# Altium PCB E-29 Humidity Sensor.PcbDoc
Units mil, origin at the board's own origin, x right, y up, seen from the top; angles counter-clockwise.
Board outline 1078 x 1543 mil, 2 copper layers (Top Layer, Bottom Layer); 16 components, 16 nets, 70 pads, 11 vias.
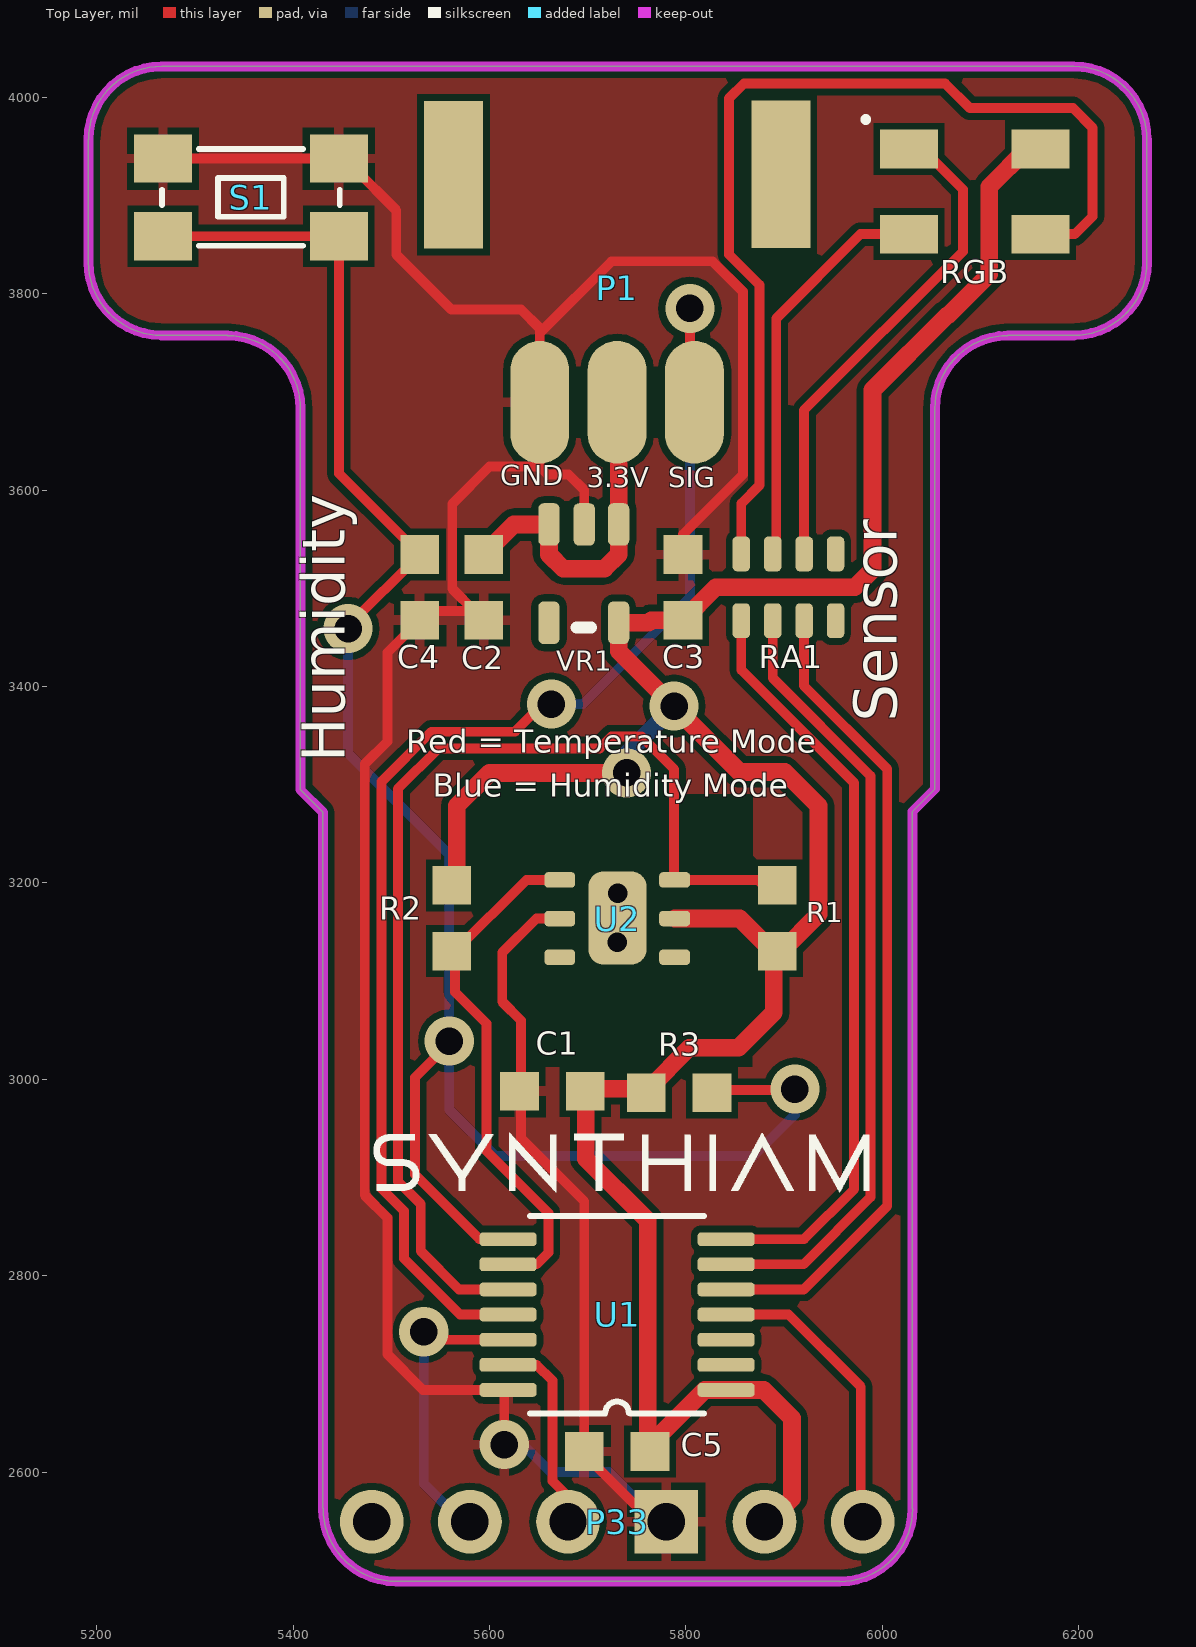
[diagram p0: Top Layer view]
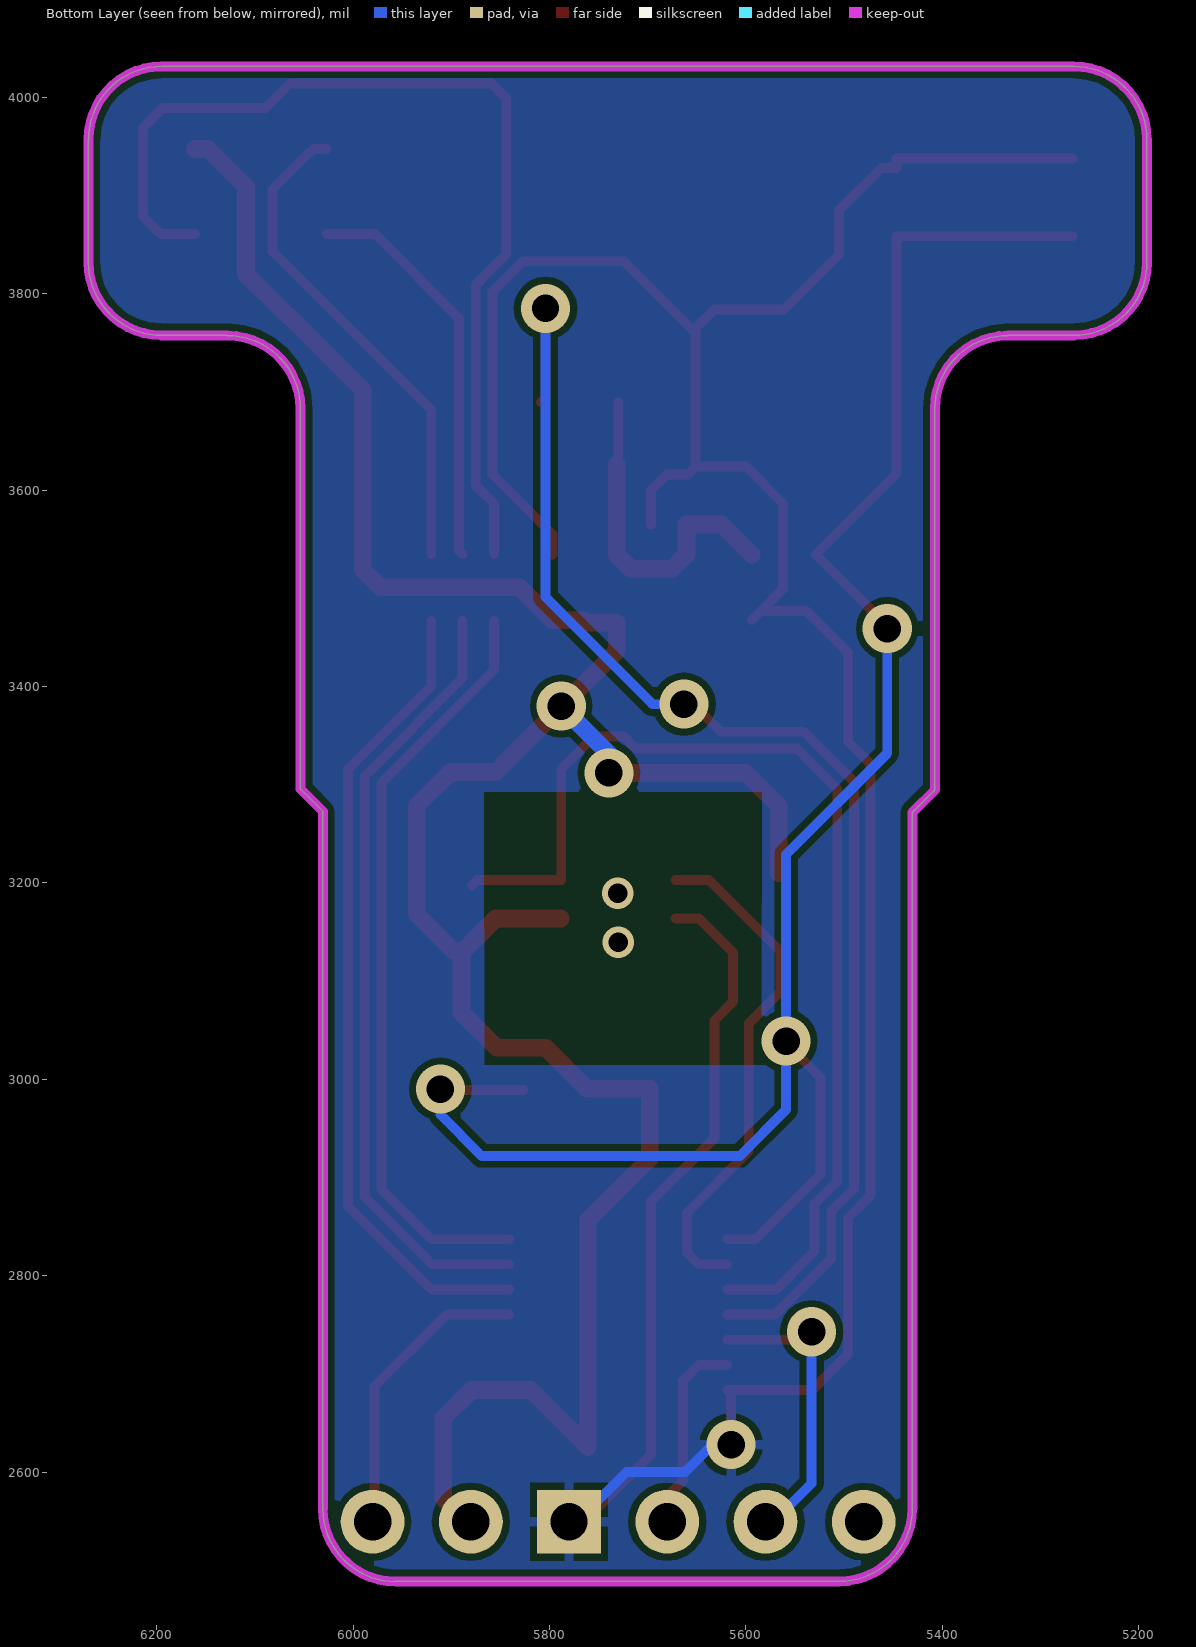
[diagram p1: Bottom Layer view, seen from below]

## Layer stack, top to bottom
Top Layer: signal copper 1.4
Dielectric: dielectric 12.6, FR-4, Dk 4.8
Bottom Layer: signal copper 1.4

## Board outline
5407.5,3294.81 5407.5,3683 ccw(c5333.19,3683) 5333.19,3757.31 5333.19,3757.5 5265.81,3757.5 5265.81,3757.69 cw(c5265.81,3832) 5191.5,3832 5191.5,3957.19 5191.69,3957.19 cw(c5266,3957.19) 5266,4031.5 6195,4031.5 cw(c6195,3957.19) 6269.31,3957.19 6269.5,3957.19 6269.5,3832 cw(c6195.19,3832) 6195.19,3757.69 6195.19,3757.5 6127.81,3757.5 6127.81,3757.31 ccw(c6127.81,3683) 6053.5,3683 6053.5,3295.5 6030.69,3272.69 6030.69,2562.81 6030.81,2562.81 cw(c5956.5,2562.81) 5956.5,2488.5 5956.5,2488.69 5504.81,2488.69 cw(c5504.81,2563) 5430.5,2563 5430.31,2563 5430.31,3272

## Design rules (kind name [scope] priority, off if disabled: settings)
Clearance [All] p1: gap=7
PolygonConnect [All] p1: connectstyle=Relief reliefconductorwidth=10 reliefentries=4 polygonreliefangle="90 Angle"
RoutingVias [All] p1: holewidth=28 width=50 viastyle="Through Hole" minholewidth=28 minwidth=50 maxholewidth=28 maxwidth=50
SilkscreenOverComponentPads [All] p1: minsilkscreentomaskgap=10
SolderMaskExpansion [All] p1: expansion=4
Width Width_1 [InNet('VCC')] p1: maxlimit=25 minlimit=10 preferedwidth=18 minimp=50.000000 maximp=50.000000 favimp=50.000000
Width Width_2 [InNet('VIN')] p2: maxlimit=25 minlimit=10 preferedwidth=18 minimp=50.000000 maximp=50.000000 favimp=50.000000
Width [All] p3: maxlimit=25 minlimit=7 preferedwidth=10 minimp=50.000000 maximp=50.000000 favimp=50.000000
27 further rules are at their usual default settings.

## Components (designator, comment, footprint, x,y, rotation, side; value= is the part's Value field where it differs from the comment)
C1 "100nF" "0603 TIGHT" 5664,2988 r180 top
C2 "2.2uF" "0603 TIGHT" 5594,3501 r270 top
C3 "100nF" "0603 TIGHT" 5797,3501 r90 top
C4 "100nF" "0603 TIGHT" 5529,3501 r270 top
C5 "100nF" "0603 TIGHT" 5730,2621 r180 top
P1 "JST 3-pin" "JST-PH 3-pin SMD" 5730,3805.5 r0 top
P33 "Header 6" HDR1X6 5980,2549.5 r180 top
R1 "10kohm" "0603 TIGHT" 5893,3164 r270 top
R2 "10kohm" "0603 TIGHT" 5561.5,3164 r90 top
R3 "10kohm" "0603 TIGHT" 5793,2986.5 r180 top
RA1 "680 ohm" "Resistor Array 4" 5905,3499.82 r0 top (schematic designator RA4)
RGB "RGBLED-CA" RGBLED-CA 6094,3904 r180 top (schematic designator LED1)
S1 "BTN" SW-SMD 5357,3898.06 r0 top
U1 "PIC16F1704" TSSOP14 5729,2762 r180 top
U2 "HDC1080" HDC1080 5730,3163.71 r0 top
VR1 "3.3VREG" "SOT-25 New" 5696.5,3508 r0 top

## Footprints (in the part's own frame and the unit in brackets; to place one, negate y for a bottom-side part, rotate by r counter-clockwise, add the part's x,y. Pads: shape width x height; smd on the part's side, far side on the other; paste and mask are expansions set on the pad)
"0603 TIGHT" [mm]
  rect 1x1 smd: 1(-0.85,0) 2(0.85,0)
HDC1080 [mm]
  rrect50% 1.5x2.4 smd: 0(0.005,0.015)
  rrect50% 0.8x0.4 smd: 1(-1.485,1) 2(-1.485,0) 3(-1.485,-1) 4(1.485,-1) 5(1.485,0) 6(1.485,1)
HDR1X6 [mil] "Connector; Header; 6 Position"
  round 65 hole 38: 1(0,0) 2(100,0) 4(300,0) 5(400,0) 6(500,0)
  rect 65x65 hole 38: 3(200,0)
"JST-PH 3-pin SMD" [mil]
  rect 60x150 smd: 0(-166.71,115.62) 0(166.71,116.02)
  oval 60x125 smd: 1(-78.82,-116.02) 2(-0.08,-116.02) 3(78.66,-116.02)
"Resistor Array 4" [mm]
  rrect50% 0.45x0.9 smd: 1(-1.235,-0.834) 2(-1.235,0.894) 3(-0.422,-0.834) 4(-0.422,0.894) 5(0.391,-0.834) 6(0.391,0.894) 7(1.204,-0.834) 8(1.204,0.894)
RGBLED-CA [mm]
  rect 1.5x1 smd: 1(1.7,-1.1) 2(-1.7,-1.1) 3(-1.7,1.1) 4(1.7,1.1)
  silkscreen extent 2.81,-1.88 2.83,-1.85
"SOT-25 New" [mm]
  rrect50% 0.55x1.1 smd: 1(-0.914,-1.092) 2(0.889,-1.092) 3(0,1.448) 4(-0.914,1.448) 5(0.889,1.448)
  silkscreen extent -0.2,-1.22 0.18,-1.22
SW-SMD [mm]
  rect 1.5x1.25 smd: 1(-2.275,-1.005) 1(2.275,-1.005) 2(-2.275,1.005) 2(2.275,1.005)
  silkscreen extent -2.3,-1.25 2.3,1.25
TSSOP14 [mil] "PIC16F1503"
  rrect50% 58x14 smd mask+4: 1(-111.87,78.35) 2(-111.87,52.76) 3(-111.87,27.17) 4(-111.87,1.57) 5(-111.87,-24.02) 6(-111.87,-49.61) 7(-111.87,-75.2) 8(110.13,-75.2) 9(110.13,-49.61) 10(110.13,-24.02) 11(110.13,1.57) 12(110.13,27.17) 13(110.13,52.76) 14(110.13,78.35)
  silkscreen extent -89,-99 88,102

## Part data
C1 C2 C3 C4 C5: library part Cap, "Capacitor"
P1: library part "Header 3", "Header, 3-Pin"
P33: "Header, 6-Pin"
R1 R2 R3: library part Res1, "Resistor"
RA1: library part "Resistor Array 4"
S1: library part SW-SMD
VR1: library part "Vreg SOT25"

## Free pads (board coordinates)
  round 225 on Bottom Solder: 0(5730,2734.5)

## Via types
v1: diameter 50, hole 28, Top Layer to Bottom Layer, tented both sides, 9 vias
v2: diameter 32, hole 19.7, Top Layer to Bottom Layer, tented both sides, 2 vias

## Nets (pads, with @x,y where several pads share a name; then routed paths per layer and width w, separated by ;. In a path a pad name is that pad's centre, name@x,y a point inside that pad or via, vN(x,y) a via of type N, cw(c..) or ccw(c..) an arc to the next point about the centre after c; other vN are vias at no path point)
DAC_OUT: P1.3 U1.11 | length 1407.7
  Top Layer w10: U1.11 5570,2760.43 5513,2817.43 5513,2865.92 5489.96,2888.96 5489.96,3303 5540.96,3354 5625.96,3354 5659.54,3387.58 v1@5660.42,3387.58 ; v1(5804,3785) 5804,3694.14 P1.3
  Bottom Layer w10: v1(5663,3382) 5695,3382 5804,3491 v1(5804,3785)
GND: C1.2 C2.2 C3.2 C4.2 C5.2 P1.1 P33.3 S1.2 U1.14 U2.2 VR1.3 | length 3459.9
  Top Layer w10: S1.2@5267.43,3937.63 5446.57,3937.63 5446.57,3928 5462,3928 5505,3885 5505,3840 5561,3784 5632,3784 5651.18,3764.82 5651.18,3760 ; C2.2 C2.2@5584.52,3477.01 ; v1(5615,2628) U1.14@5615,2683.65 ; U1.14 U1.14@5615,2683.65 ; U2.2 5647.71,3163.71 5613,3129 5613,3079 5632,3060 5632,2940 5696.54,2875.46 5696.54,2618 5771.04,2543.5 P33.3@5778,2543.5 ; VR1.3 5696.5,3600 5680.5,3616 5659.18,3616 5651.18,3624 ; C3.2 5797,3555 5858,3616 5858,3802 5827,3833 5724.18,3833 5651.18,3760 ; C2.2@5584.52,3477.01 5538.48,3477.01 C4.2 5496,3434.54 5496,3344.04 5472.96,3321 5472.96,2881.92 5496,2858.88 5496,2720 5532.35,2683.65 U1.14@5615,2683.65 ; C2.2@5584.52,3477.01 5562,3499.54 5562,3586 5600,3624 5651.18,3624 ; 5651.18,3624 P1.1 5651.18,3760
  Bottom Layer w10: v1(5615,2628) 5634,2628 5662,2600 5721.5,2600 P33.3@5778,2543.5
MCLR: P33.1 U1.4 | length 311
  Top Layer w10: U1.4 5904.57,2760.43 5978,2687 P33.1@5978,2543.5
NetC4_1: C4.1 R3.1 S1.1 U1.8 | length 1933.4
  Top Layer w10: S1.1@5267.43,3858.5 5446.57,3858.5 5446.57,3616.9 C4.1 5456,3461.46 v1(5456,3459) ; v1@5551,3029 5523.96,3001.96 5523.96,2903.04 5589.8,2837.2 U1.8 ; R3.1@5826.46,2989 v1@5910,2989
  Bottom Layer w10: v1(5456,3459) 5456,3332 5559,3229 v1(5559,3039) 5559,2969 5606,2922 5869,2922 5911,2964 v1(5911,2990)
NetLED1_1: RA1.6 RGB.1 | length 510
  Top Layer w10: RA1.6 5920.39,3681.39 6082,3843 6082,3906 6040.69,3947.31 RGB.1
NetLED1_3: RA1.2 RGB.3 | length 1030.2
  Top Layer w10: RA1.2 5856.39,3586.3 5875,3604.91 5875,3809.04 5844,3840.04 5844,3999 5859,4014 6064,4014 6089,3989 6194,3989 6214,3969 6214,3878.69 6196,3860.69 RGB.3
NetLED1_4: RA1.4 RGB.4 | length 412
  Top Layer w10: RA1.4 5892,3538.61 5892,3774.94 5977.75,3860.69 RGB.4
NetRA1_1: RA1.1 U1.7 | length 777.7
  Top Layer w10: U1.7 5920.2,2837.2 5971,2888 5971,3302 5856.39,3416.61 RA1.1
NetRA1_3: RA1.3 U1.6 | length 803.7
  Top Layer w10: U1.6 5919.61,2811.61 5988,2880 5988,3309.04 5888.39,3408.66 RA1.3
NetRA1_5: RA1.5 U1.5 | length 830.4
  Top Layer w10: U1.5 5920,2786.02 6005,2871.02 6005,3316.08 5920.39,3400.7 RA1.5
PGC: P33.5 U1.12 | length 307.4
  Top Layer w10: v1(5533,2743) 5541.17,2734.83 U1.12
  Bottom Layer w10: v1(5533,2743) 5533,2588.5 P33.5@5578,2543.5
PGD: P33.4 U1.13 | length 207.3
  Top Layer w10: U1.13 5648,2709.24 5664,2693.24 5664,2591 5678,2577 P33.4@5678,2543.5
SCL: R1.1 U1.10 U2.6 | length 1108.3
  Top Layer w10: U1.10 5568.98,2786.02 5530,2825 5530,2872.96 5506.96,2896 5506.96,3295.96 5548,3337 5712.17,3337 5724.17,3349 5754.83,3349 5788,3315.83 5788,3203.08 U2.6 5873.39,3203.08 R1.1@5879,3197.46
SDA: R2.1 U1.9 U2.1 | length 528.9
  Top Layer w10: U1.9 5648,2811.61 5660,2823.61 5660,2864 5597,2927 5597,3057 5565,3089 5565,3130.5 5637.58,3203.08 U2.1
VCC: C1.1 C3.1 C5.1 P33.2 R1.2 R2.2 R3.2 RGB.2 U1.1 U2.5 VR1.2 | length 2711.6
  Top Layer w18: R2.2@5566.5,3209.96 5566.5,3278.5 5600,3312 v1(5739.5,3312) ; U2.5 5854.79,3163.71 R1.2@5886.75,3131.75 ; P33.2@5878,2543.5 5908,2573.5 5908,2655 5879.35,2683.65 U1.1 5819,2683.65 5761,2625.65 5761,2856.26 5698,2919.26 5698,2990.5 5762,2990.5 5803.5,3032 5853.5,3032 5889.5,3068 5889.5,3130.54 5897.54,3130.54 5935,3168 5935,3278.5 5900.5,3313 5854.5,3313 5731.5,3436 VR1.2 5762,3465 5764.54,3467.54 C3.1 5830.46,3501 5972,3501 5990,3519 5990,3701.96 6066.04,3778 6067.03,3778 6109,3819.97 6109,3909 6147.31,3947.31 RGB.2
  Bottom Layer w18: v1@5730,3301 5730,3322 v1(5788,3380)
VIN: C2.1 P1.2 VR1.4 VR1.5 | length 348.3
  Top Layer w10: P1.2 5729.92,3627.58 5731.5,3626
  Top Layer w18: C2.1 5624.54,3565 VR1.4 5660.5,3534.5 5675,3520 5717,3520 5731.5,3534.5 VR1.5 5731.5,3626
pads on no net: P1.0 P33.6 RA1.7 RA1.8 U1.2 U1.3 U2.0 U2.3 U2.4 VR1.1
copper on no net:
  other v2: 5730,3139.5 5730.5,3189.5

## Polygon pours and split planes (outlines as drawn)
GND on Top Layer "GTL" (solid, pour order 2): 5407.5,3294.81 5407.5,3683 ccw(c5333.19,3683) 5333.19,3757.31 5333.19,3757.5 5265.81,3757.5 5265.81,3757.69 cw(c5265.81,3832) 5191.5,3832 5191.5,3957.19 5191.69,3957.19 cw(c5266,3957.19) 5266,4031.5 6195,4031.5 cw(c6195,3957.19) 6269.31,3957.19 6269.5,3957.19 6269.5,3832 cw(c6195.19,3832) 6195.19,3757.69 6195.19,3757.5 6127.81,3757.5 6127.81,3757.31 ccw(c6127.81,3683) 6053.5,3683 6053.5,3295.5 6030.69,3272.69 6030.69,2562.81 6030.81,2562.81 cw(c5956.5,2562.81) 5956.5,2488.5 5956.5,2488.69 5504.81,2488.69 cw(c5504.81,2563) 5430.5,2563 5430.31,2563 5430.31,3272
GND on Bottom Layer "GBL" (solid, pour order 5): 5407.5,3294.81 5407.5,3683 ccw(c5333.19,3683) 5333.19,3757.31 5333.19,3757.5 5265.81,3757.5 5265.81,3757.69 cw(c5265.81,3832) 5191.5,3832 5191.5,3957.19 5191.69,3957.19 cw(c5266,3957.19) 5266,4031.5 6195,4031.5 cw(c6195,3957.19) 6269.31,3957.19 6269.5,3957.19 6269.5,3832 cw(c6195.19,3832) 6195.19,3757.69 6195.19,3757.5 6127.81,3757.5 6127.81,3757.31 ccw(c6127.81,3683) 6053.5,3683 6053.5,3295.5 6030.69,3272.69 6030.69,2562.81 6030.81,2562.81 cw(c5956.5,2562.81) 5956.5,2488.5 5956.5,2488.69 5504.81,2488.69 cw(c5504.81,2563) 5430.5,2563 5430.31,2563 5430.31,3272

## Keep-outs
Keep-Out Layer:
  lines w10: 5191.5,3957.19 5191.5,3832 ccw(c5265.81,3832) 5265.81,3757.69 ; 5191.69,3957.19 cw(c5266,3957.19) 5266,4031.5 6195,4031.5 cw(c6195,3957.19) 6269.31,3957.19 ; 5265.81,3757.5 5333.19,3757.5 ; 5333.19,3757.31 cw(c5333.19,3683) 5407.5,3683 5407.5,3294.81 5430.31,3272 5430.31,2563 ; 5430.5,2563 ccw(c5504.81,2563) 5504.81,2488.69 5956.5,2488.69 ; 5956.5,2488.5 ccw(c5956.5,2562.81) 6030.81,2562.81 ; 6030.69,2562.81 6030.69,3272.69 6053.5,3295.5 6053.5,3683 cw(c6127.81,3683) 6127.81,3757.31 ; 6127.81,3757.5 6195.19,3757.5 ; 6195.19,3757.69 ccw(c6195.19,3832) 6269.5,3832 6269.5,3957.19

## Other copper
Top Layer:
  pour cut-out: 5585,3291 5868.5,3290.5 5868,3012.5 5585.5,3012.5
Bottom Layer:
  pour cut-out: 5583.5,3293 5867,3292.5 5866.5,3014.5 5584,3014.5

## Silkscreen, mask and mechanical layers (free items; w line width, h text height)
Top Overlay:
  drawing of 2260 lines, arcs and shapes, not listed
  text "GND" at 5611,3598 h35
  text "3.3V" at 5699,3596 h35
  text "SIG" at 5782,3596 h35
  text "Sensor" at 6029,3364 h75 r90
  text "Red = Temperature Mode" at 5515,3325 h40
  text "Humidity" at 5467,3323 h75 r90
  text "Blue = Humidity Mode" at 5542,3280 h40
Bottom Solder:
  text ":)" at 5697.52,3936.5 h150 r270